# Altium PCB CW308T_MPC57.PcbDoc (part 2 of 2)
Units mil, origin at the board's own origin, x right, y up, seen from the top; angles counter-clockwise.
Board outline 2060 x 3180 mil, 4 copper layers (Component Side, Ground Plane, Power Plane, Solder Side), stack 33.234 mil thick; 90 components, 85 nets, 565 pads, 140 vias.
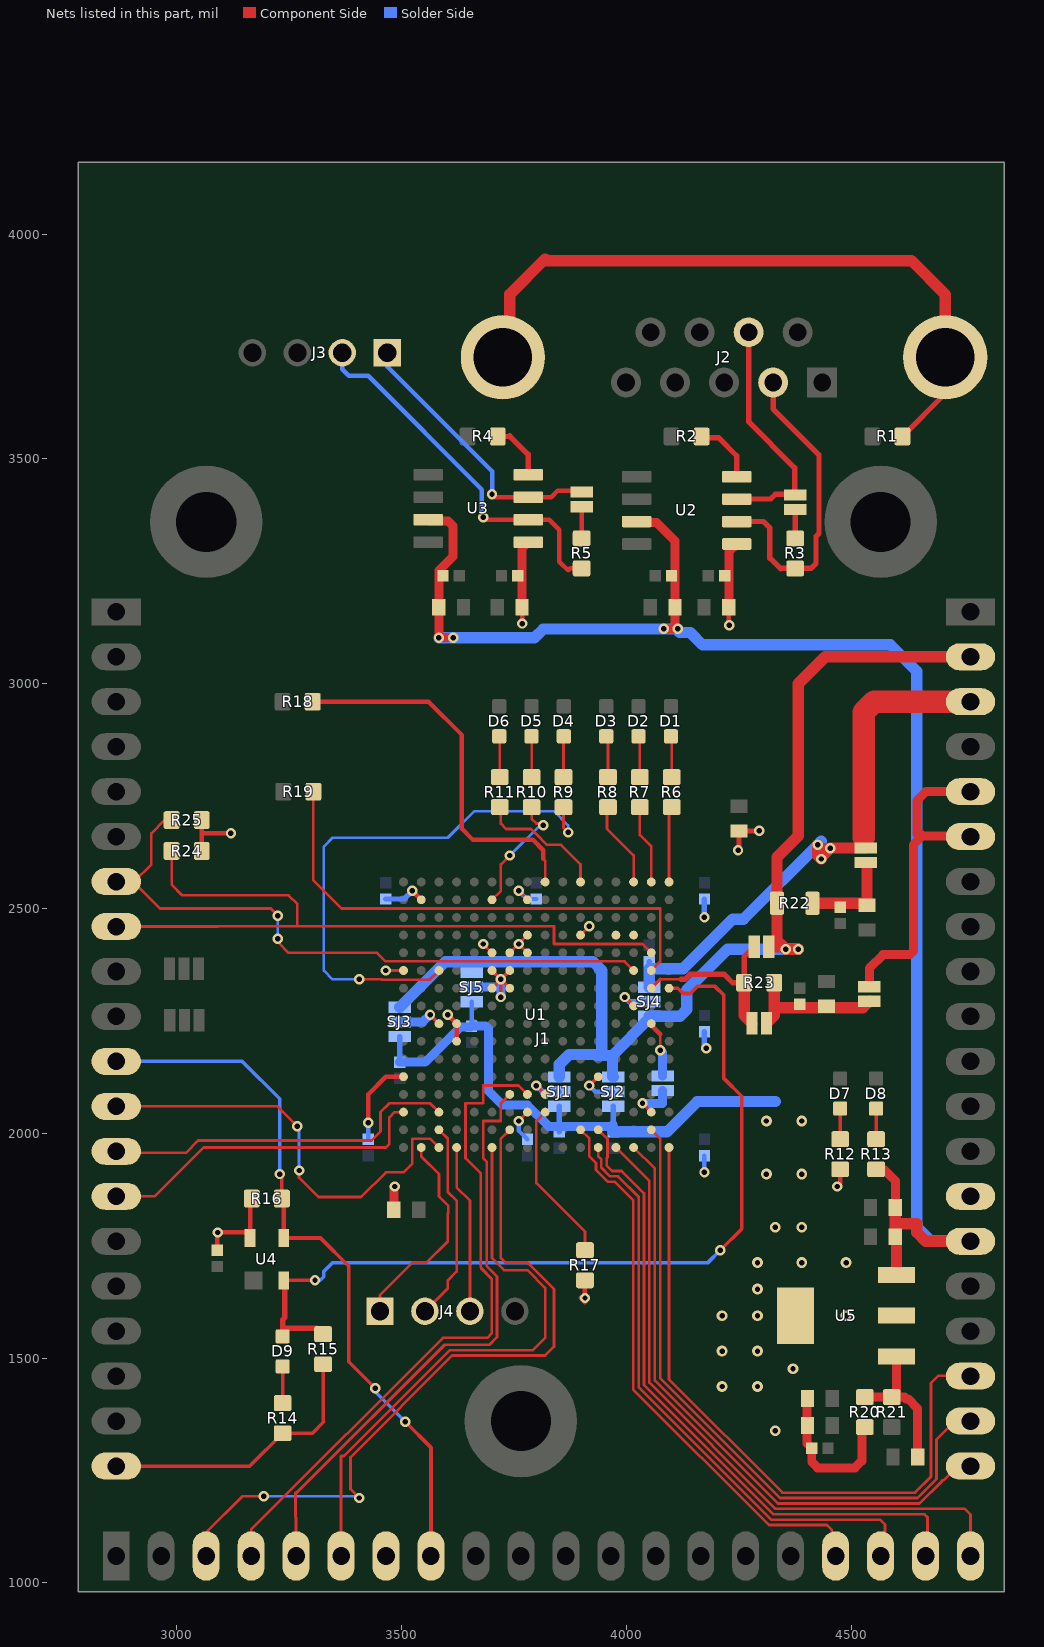
[diagram p4: the nets of this part, all layers, seen from the top]

## Via types
v1: diameter 23, hole 12, Component Side to Solder Side, tented both sides, 114 vias
v2: diameter 24, hole 12, Component Side to Solder Side, tented both sides, 25 vias
v3: diameter 23, hole 12, Component Side to Solder Side, 1 vias

## Nets (pads, with @x,y where several pads share a name; then routed paths per layer and width w, separated by ;. In a path a pad name is that pad's centre, name@x,y a point inside that pad or via, vN(x,y) a via of type N, cw(c..) or ccw(c..) an arc to the next point about the centre after c; other vN are vias at no path point) (continued)
HDR7: J1.B17 U1.B6 | length 1267.9
  Component Side w6: U1.B6@3897.64,2007.87 3917.32,1988.19 3917.32,1948.82 3931.88,1934.26 3931.88,1918.58 3957.95,1892.51 3973.63,1892.51 4014.8,1851.34 4014.8,1430.62 4316.63,1128.79 4446.02,1128.79 4456.69,1118.11 4456.69,1068.31 J1.B17@4465,1060
HDR8: J1.B18 U1.A5 | length 1329.5
  Component Side w6: U1.A5@3937.01,1968.5 3937.01,1948.82 3943.88,1941.95 3943.88,1923.55 3962.92,1904.51 3981.32,1904.51 4026.8,1859.02 4026.8,1435.59 4321.6,1140.79 4563.94,1140.79 4574.8,1129.92 4574.8,1069.8 J1.B18@4565,1060
HDR9: J1.B19 U1.B5 | length 1463.6
  Component Side w6: U1.B5@3937.01,2007.87 3957.54,1987.35 3957.54,1947.16 3955.88,1945.5 3955.88,1928.52 3967.89,1916.51 3989,1916.51 4038.8,1866.71 4038.8,1440.56 4326.57,1152.79 4662.75,1152.79 4669.29,1146.24 4669.29,1064.29 J1.B19@4665,1060
HDR10: J1.B20 U1.A4 | length 1482.2
  Component Side w6: U1.A4@3976.38,1968.5 4050.8,1894.08 4050.8,1445.53 4331.55,1164.79 4656.64,1164.79 4657.21,1165.35 4751.97,1165.35 4765,1152.32 J1.B20@4765,1060
LED1: J1.C18 U1.A1 | length 1520.8
  Component Side w6: U1.A1@4094.49,1968.5 4094.49,1452.76 4346.46,1200.79 4641.73,1200.79 4677.17,1236.22 4677.17,1444.88 4692.91,1460.63 4764.37,1460.63 J1.C18@4765,1460
LED2: J1.C19 U1.B2 | length 1483.6
  Component Side w6: U1.B2@4055.12,2007.87 4074.8,1988.19 4074.8,1455.47 4341.49,1188.79 4646.7,1188.79 4689.17,1231.25 4689.17,1319.09 4730.08,1360 J1.C19@4765,1360
LED3: J1.C20 U1.A3 | length 1388.2
  Component Side w6: U1.A3@4015.75,1968.5 4062.8,1921.45 4062.8,1450.5 4336.52,1176.79 4651.67,1176.79 4701.17,1226.28 4701.17,1227.43 4702.08,1228.35 4704.72,1228.35 4736.38,1260 J1.C20@4765,1260
LED_BLOAD: R11.1 U1.T6 | length 291.6
  Component Side w6: R11.1@3717.91,2725.51 3720.47,2722.95 3720.47,2688.98 3732.28,2677.17 3787.4,2677.17 3797.02,2667.54 3797.14,2667.54 3822.95,2641.73 3854.33,2641.73 3897.64,2598.43 U1.T6@3897.64,2559.06
LED_CLKOK: R10.1 U1.R11 | length 275.5
  Component Side w6: U1.R11@3700.79,2519.69 3720.47,2539.37 3720.47,2598.43 v1(3740.16,2618.11) ; R10.1@3788.86,2725.51 3788.86,2699.33 3799.21,2688.98 3811.02,2688.98 v1(3814.96,2685.04)
  Solder Side w6: v1(3740.16,2618.11) 3807.09,2685.04 v1(3814.96,2685.04)
LED_CORE0: R6.1 U1.T1 | length 169
  Component Side w6: U1.T1@4094.49,2559.06 4094.49,2719.41 R6.1@4100.59,2725.51
LED_CORE1: R7.1 U1.T2 | length 177
  Component Side w6: R7.1@4029.65,2725.51 4029.65,2663.27 4055.12,2637.8 U1.T2@4055.12,2559.06
LED_CORE2: R8.1 U1.T3 | length 191.7
  Component Side w6: R8.1@3958.7,2725.51 3956.69,2723.5 3956.69,2677.17 4015.75,2618.11 U1.T3@4015.75,2559.06
LED_HSM: R9.1 U1.L14 | length 1213.7
  Component Side w6: v1(3405.51,2342.52) 3455.26,2342.52 3456.08,2341.7 3562.18,2341.7 U1.L14@3582.68,2362.2 ; R9.1@3859.8,2725.51 3859.8,2679.57 v1(3870.08,2669.29)
  Solder Side w6: v1(3405.51,2342.52) 3346.46,2342.52 3326.77,2362.2 3326.77,2637.8 3346.46,2657.48 3602.36,2657.48 3661.42,2716.54 3838.58,2716.54 3870.08,2685.04 v1(3870.08,2669.29)
LIN0RX: U1.N4
LIN0TX: U1.N3
MISO: J1.A13 U1.C14 | length 798.2
  Component Side w6: J1.A13@2865,1960 2868.31,1956.69 3019.68,1956.69 3047.24,1984.25 3433.07,1984.25 3452.76,2003.94 3452.76,2047.24 3472.44,2066.93 3562.99,2066.93 U1.C14@3582.68,2047.24
MOSI: J1.A14 U1.C16 | length 751.1
  Component Side w6: J1.A14@2865,1860 2950.55,1860 3059.06,1968.5 3464.57,1968.5 3472.44,1976.38 3472.44,2035.43 3484.25,2047.24 U1.C16@3503.94,2047.24
NetC18_1: C18.1 C19.1 R23.1 SJ11.2 SJ12.1 | length 314.6
  Component Side w25: SJ12.1@4311.22,2245 4328.46,2262.25 4328.46,2279.53 ; R23.1@4328.46,2335 4328.46,2279.53 ; SJ11.2@4540,2293.78 4525.74,2279.53 4328.46,2279.53
NetC31_1: C31.1 R20.2 R21.1 U5.1 | length 330.8
  Component Side w20: R20.2@4530,1413.46 R21.1@4590,1413.46 ; U5.1@4600.39,1503.94 4600.39,1423.86 R21.1@4590,1413.46 ; C31.1@4647.56,1280 4647.56,1387.87 4625.98,1409.45 4622.05,1409.45 4618.11,1413.39 4590.08,1413.39 R21.1@4590,1413.46
NetC32_1: C32.1 C33.1 R22.2 SJ8.1 | length 219.6
  Component Side w25: R22.2@4413.39,2511.81 4530.75,2511.81 C32.1@4535,2507.56 4535,2598.86 SJ8.1@4531.5,2602.36
NetD1_A: D1.A R6.2 | length 91.5
  Component Side w6: D1.A@4098.52,2883.09 4100.59,2881.02 R6.2@4100.59,2792.44
NetD2_A: D2.A R7.2 | length 91.9
  Component Side w6: D2.A@4026.67,2883.09 4029.65,2880.12 R7.2@4029.65,2792.44
NetD3_A: D3.A R8.2 | length 92.3
  Component Side w6: D3.A@3954.82,2883.09 3958.7,2879.21 R8.2@3958.7,2792.44
NetD4_A: D4.A R9.2 | length 90.9
  Component Side w6: R9.2@3859.8,2792.44 3859.8,2882.44 D4.A@3860.45,2883.09
NetD5_A: D5.A R10.2 | length 90.8
  Component Side w6: D5.A@3788.6,2883.09 3788.86,2882.83 R10.2@3788.86,2792.44
NetD6_A: D6.A R11.2 | length 91.1
  Component Side w6: D6.A@3716.75,2883.09 3717.91,2881.93 R11.2@3717.91,2792.44
NetD7_A: D7.A R12.2 | length 68.1
  Component Side w8: R12.2@4475,1987.09 D7.A@4475,2055.16
NetD8_A: D8.A R13.2 | length 68.1
  Component Side w8: R13.2@4555,1987.09 D8.A@4555,2055.16
NetD9_A: D9.A R14.2 | length 81.5
  Component Side w8: R14.2@3235,1400 D9.A@3235,1481.54
NetD9_K: D9.K R15.2 U1.K1 U4.2 | length 1973.7
  Component Side w8: U4.2@3237.4,1672.76 3237.87,1673.23 v1(3307.09,1673.23) ; U1.K1@4094.49,2322.83 4114.17,2322.83 4125.98,2311.02 4141.73,2311.02 4157.48,2326.77 4196.85,2326.77 4216.54,2307.09 4216.54,2122.05 4255.91,2082.68 4255.91,1787.4 v1(4208.66,1740.16)
  Component Side w12: D9.K@3235,1548.46 3235,1566.93 ; U4.2@3237.4,1672.76 3240.16,1670 3240.16,1590.55 3235,1585.39 3235,1566.93 ; R15.2@3325,1553.46 3311.54,1566.93 3235,1566.93
  Solder Side w8: v1(3307.09,1673.23) 3318.9,1673.23 3326.77,1681.1 3326.77,1692.91 3346.46,1712.6 4181.1,1712.6 v1(4208.66,1740.16)
NetJ2_2: J2.2 R3.2 U2.6 | length 711.1
  Component Side w12: U2.6@4245.08,3360.83 4304.53,3360.83 4318.9,3346.46 4318.9,3279.53 4342.52,3255.91 4343.15,3256.54 R3.2@4375,3256.54 4410.08,3256.54 4421.26,3267.72 4421.26,3327.91 4428,3334.65 4428,3509.01 4325.94,3611.06 J2.2@4325.94,3670
NetJ2_7: J2.7 SJ6.2 U2.7 | length 536.1
  Component Side w12: U2.7@4245.08,3410.83 4320.28,3410.83 4330.71,3421.26 4373.74,3421.26 4374.02,3421.54 4374.02,3480.32 4271.42,3582.91 J2.7@4271.42,3781.81
NetJ2_10: J2.10 J2.11 R1.2 | length 1536
  Component Side w12: R1.2@4613.46,3550 4708.82,3645.35 J2.11@4708.82,3725.9
  Component Side w25: J2.10@3724.96,3725.9 3740.16,3741.1 3740.16,3866.14 3818.9,3944.88 3822.83,3940.94 4633.86,3940.94 4708.82,3865.99 J2.11@4708.82,3725.9
NetJ3_1: J3.1 SJ7.2 U3.7 | length 620.4
  Component Side w10: v1(3700.79,3421.26) 3707.05,3415 U3.7@3781.22,3415 3832.32,3415 3846.46,3429.13 3897.08,3429.13 SJ7.2@3900,3426.22
  Solder Side w10: J3.1@3467.72,3736.22 3467.72,3705.51 3700.79,3472.44 v1(3700.79,3421.26)
NetJ3_2: J3.2 R5.2 U3.6 | length 832.5
  Component Side w10: v1(3681.1,3370.08) 3686.18,3365 U3.6@3781.22,3365 3827.91,3365 3850.39,3342.52 3850.39,3271.65 3870.08,3251.97 3874.65,3256.54 R5.2@3900,3256.54
  Solder Side w10: J3.2@3367.72,3736.22 3367.72,3699.21 3381.89,3685.04 3425.2,3685.04 3678.29,3431.95 3678.29,3372.89 v1(3681.1,3370.08)
NetJ4_1: J4.1 U1.A15 | length 470.2
  Component Side w6: J4.1@3451.57,1604.33 3451.57,1640.55 3523.62,1712.6 3555.12,1712.6 3602.36,1759.84 3602.36,1821.4 3603.18,1822.22 3603.18,1839.2 3582.68,1859.7 3582.68,1909.45 3543.31,1948.82 U1.A15@3543.31,1968.5
NetJ4_2: J4.2 U1.B14 | length 449
  Component Side w6: J4.2@3551.57,1604.33 3602.36,1655.12 3602.36,1673.23 3622.05,1692.91 3622.05,1850.39 3602.36,1870.08 3602.36,1988.19 U1.B14@3582.68,2007.87
NetJ4_3: J4.3 U1.A13 | length 376.4
  Component Side w6: U1.A13@3622.05,1968.5 3622.05,1879.92 3651.57,1850.39 J4.3@3651.57,1604.33
NetR2_2: R2.2 U2.8 | length 142.1
  Component Side w12: R2.2@4166.93,3550 4169.69,3547.24 4204.72,3547.24 4245.08,3506.89 U2.8@4245.08,3460.83
NetR3_1: R3.1 SJ6.1 | length 64.1
  Component Side w12: R3.1@4375,3323.46 SJ6.1@4375,3387.57
NetR4_2: R4.2 U3.8 | length 130.4
  Component Side w12: R4.2@3713.46,3550 3738.98,3550 3740.16,3551.18 3781.22,3510.12 U3.8@3781.22,3465
NetR5_1: R5.1 SJ7.1 | length 70.3
  Component Side w10: R5.1@3900,3323.46 SJ7.1@3900,3393.78
NetR17_2: R17.2 U1.C8 | length 360.1
  Component Side w6: U1.C8@3818.9,2047.24 3799.21,2027.56 3799.21,1889.76 3907.48,1781.5 R17.2@3907.48,1740.16
NetR18_2: R18.2 U1.T8 | length 844.5
  Component Side w6: 3814.96,2610.24 3818.9,2606.3 U1.T8@3818.9,2559.06
  Component Side w10: R18.2@3301.93,2960 3559.69,2960 3633.86,2885.83 3633.86,2677.17 3657.48,2653.54 3791.34,2653.54 3814.96,2629.92 3814.96,2610.24
NetR19_1: R19.1 U1.L2 | length 1140.6
  Component Side w6: R19.1@3303.46,2760 3303.46,2562.68 3366.14,2500 4074.8,2500 4074.8,2381.89 U1.L2@4055.12,2362.2
NetR23_2: R23.2 SJ10.2 SJ12.2 U1.K2 | length 414.1
  Component Side w6: 4074.8,2342.52 4122.05,2342.52
  Component Side w8: U1.K2@4055.12,2322.83 4074.8,2342.52
  Component Side w12: 4122.05,2342.52 4129.92,2342.52 4141.73,2354.33 4216.54,2354.33 4236.22,2334.65 4261.18,2334.65 R23.2@4261.54,2335 4261.54,2392.75 SJ10.2@4283.78,2415
  Component Side w25: R23.2@4261.54,2335 4261.54,2262.25 SJ12.2@4278.78,2245
NetSJ1_2: SJ1.2 U1.D8 | length 84.5
  Component Side w8: v1(3799.21,2106.3) U1.D8@3818.9,2086.61
  Solder Side w12: v1(3799.21,2106.3) 3812.71,2092.8 SJ1.2@3850.31,2092.8
NetSJ2_2: SJ2.2 U1.E5 | length 86.4
  Component Side w8: v1(3917.32,2106.3) U1.E5@3937.01,2125.98
  Solder Side w10: v1(3917.32,2106.3) 3930.82,2092.8 SJ2.2@3970.31,2092.8
NetSJ3_2: SJ3.2 U1.H14 | length 102.1
  Component Side w8: v1(3562.99,2263.78) U1.H14@3582.68,2244.09
  Solder Side w20: SJ3.2@3495.31,2247.8 3547.01,2247.8 v1(3562.99,2263.78)
NetSJ4_2: SJ4.2 U1.J3 | length 86.4
  Component Side w8: v1(3996.06,2303.15) U1.J3@4015.75,2283.46
  Solder Side w12: v1(3996.06,2303.15) 4006.43,2292.79 SJ4.2@4050.31,2292.79
NetSJ5_2: SJ5.2 U1.K10 U1.K11 U1.L10 U1.L11 | length 255.8
  Component Side w8: U1.K11@3700.79,2322.83 v1(3720.47,2342.52) ; U1.L11@3700.79,2362.2 v1(3720.47,2342.52) ; v1(3720.47,2303.15) v1(3720.47,2342.52) ; U1.K10@3740.16,2322.83 v1(3720.47,2342.52) ; U1.L10@3740.16,2362.2 v1(3720.47,2342.52)
  Solder Side w20: SJ5.2@3655.31,2325.35 3719.06,2325.35 3720.47,2326.77 ; v1(3720.47,2303.15) 3720.47,2326.77 ; v1(3720.47,2342.52) 3720.47,2326.77
NetSJ9_1: SJ9.1 U1.H2 | length 126.7
  Component Side w6: v1(4074.8,2185.04) 4074.8,2220.47
  Component Side w10: U1.H2@4055.12,2244.09 4055.12,2240.16 4074.8,2220.47
  Solder Side w20: v1(4074.8,2185.04) 4080.31,2179.53 SJ9.1@4080.31,2127.79
NRST: J1.A11 J1.B8 R16.2 U4.3 | length 1602.1
  Component Side w8: v1(3228.35,1909.45) 3233.46,1904.33 R16.2@3233.46,1855 ; U4.3@3237.4,1767.24 3319.37,1767.24 3381.89,1704.72 3381.89,1492.13 v1(3440.94,1433.07) ; v1(3507.87,1358.27) 3565,1301.14 J1.B8@3565,1060
  Component Side w10: R16.2@3233.46,1855 3237.4,1851.06 U4.3@3237.4,1767.24
  Solder Side w8: J1.A11@2865,2160 3145.12,2160 3228.35,2076.77 v1(3228.35,1909.45) ; v1(3440.94,1433.07) 3440.94,1425.2 v1(3507.87,1358.27)
SCK: J1.A12 U1.A14 | length 960.1
  Component Side w6: J1.A12@2865,2060 3223.46,2060 v1(3267.72,2015.75) ; v1(3271.65,1917.32) 3271.65,1901.57 3314.96,1858.27 3409.45,1858.27 3464.57,1913.39 3503.94,1913.39 3523.62,1933.07 3523.62,1988.19 3562.99,1988.19 U1.A14@3582.68,1968.5
  Solder Side w6: v1(3267.72,2015.75) 3271.65,2011.81 v1(3271.65,1917.32)
TCK: J1.B6 U1.A11 | length 1287.7
  Component Side w6: J1.B6@3365,1060 3365,1282.32 3371.65,1282.32 3607.23,1517.91 3791.53,1517.91 3818.9,1545.28 3818.9,1656.26 3779.53,1695.63 3727.6,1695.63 3700.79,1722.44 U1.A11@3700.79,1968.5
TDI: J1.B3 U1.B10 | length 1649.4
  Component Side w6: J1.B3@3065,1060 3065,1112.24 3145.67,1192.91 v1(3192.91,1192.91) ; v1(3405.51,1188.98) 3385.83,1208.66 3385.83,1279.53 3612.2,1505.91 3818.9,1505.91 3838.58,1525.59 3838.58,1653.54 3779.53,1712.6 3730.31,1712.6 3720.47,1722.44 3720.47,1988.19 U1.B10@3740.16,2007.87
  Solder Side w6: v1(3192.91,1192.91) 3401.57,1192.91 v1(3405.51,1188.98)
TDO: J1.B4 U1.D9 | length 1496
  Component Side w6: J1.B4@3165,1060 3165,1118.98 3591.3,1545.28 3690.22,1545.28 3700.06,1555.12 3700.06,1676.67 3676.79,1699.94 3676.79,1701.91 3675.94,1702.76 3675.94,1910.67 3641.73,1944.88 3641.73,2066.93 3681.1,2066.93 3681.1,2106.3 3759.84,2106.3 U1.D9@3779.53,2086.61
TMS: J1.B5 U1.D10 | length 1333.1
  Component Side w6: J1.B5@3265,1060 3265,1145.67 3263.78,1146.89 3263.78,1200.79 3266.49,1200.79 3595.61,1529.91 3695.26,1529.91 3712.06,1546.71 3712.06,1681.64 3688.79,1704.91 3688.79,1937.2 3681.1,1944.88 3681.1,2027.56 3720.47,2027.56 3720.47,2066.93 U1.D10@3740.16,2086.61
UART_RX: J1.A8 R24.2 U1.M2 | length 1659.4
  Component Side w6: J1.A8@2865,2460 3091.18,2460 3091.81,2460.63 3267.72,2460.63 ; R24.2@2988.19,2627.95 2988.19,2553.15 3011.81,2529.53 3248.03,2529.53 3267.72,2509.84 3267.72,2460.63 ; U1.M2@4055.12,2401.57 4035.43,2421.26 3838.58,2421.26 3838.58,2460.63 3267.72,2460.63
UART_TX: J1.A7 R25.2 U1.L3 | length 1449.9
  Component Side w6: J1.A7@2865,2560 J1.A7@2902.6,2560 ; R25.2@2988.19,2696.85 2972.44,2696.85 2942.91,2667.32 2942.91,2598.43 2904.49,2560 J1.A7@2902.6,2560 ; v1(3224.41,2433.07) 3224.41,2425.2 3248.03,2401.57 3444.88,2401.57 3463.75,2382.7 3995.25,2382.7 U1.L3@4015.75,2362.2 ; v1(3224.41,2484.25) 3208.66,2500 2962.6,2500 J1.A7@2902.6,2560
  Solder Side w6: v1(3224.41,2433.07) v1(3224.41,2484.25)
VCC5V: C3.1 C4.1 C7.1 C8.1 C26.1 C27.1 J1.C15 R13.1 U2.3 U3.3 U5.3 | length 3629.8
  Component Side w20: U3.3@3558.78,3365 3561.57,3362.2 3602.36,3362.2 3614.17,3350.39 3614.17,3283.46 3582.44,3251.73 C8.1@3582.44,3170 3582.44,3102.6 v1(3582.68,3102.36) v1(3614.17,3102.36) ; U2.3@4022.64,3360.83 4025.2,3358.27 4066.93,3358.27 4107.56,3317.64 C4.1@4107.56,3170 4107.56,3128.66 v1(4114.17,3122.05) v1(4082.68,3122.05) ; R13.1@4555,1920.16 4571.97,1920.16 4598.43,1893.7 4598.43,1835.87 C26.1@4597.56,1835
  Component Side w25: C26.1@4597.56,1835 4597.56,1804.02 ; U5.3@4600.39,1685.04 4600.39,1767.17 C27.1@4597.56,1770 4597.56,1804.02 ; J1.C15@4765,1760 4665.2,1760 4645.67,1779.53 4645.67,1799.21 4602.36,1799.21 4597.56,1804.02
  Solder Side w25: v1(3582.68,3102.36) v1(3614.17,3102.36) 3795.28,3102.36 3814.96,3122.05 v1(4082.68,3122.05) v1(4114.17,3122.05) 4114.17,3118.11 4118.11,3114.17 4141.73,3114.17 4169.29,3086.61 4586.61,3086.61 4645.67,3027.56 4645.67,1791.34 4677.01,1760 J1.C15@4765,1760
VCCINT: C20.1 C21.1 C22.1 C23.1 C24.1 C28.1 C29.1 C30.1 J1.C3 R20.1 SJ1.3 SJ2.3 SJ3.3 SJ4.3 SJ5.3 SJ8.2 U5.2 U5.4 | length 2946.6
  Component Side w20: C28.1@4402.44,1410 4401.57,1409.13 4401.57,1310.32 C30.1@4411.89,1300 4411.89,1269.21 4425.2,1255.91 4507.87,1255.91 4523.62,1271.65 4523.62,1340.16 R20.1@4530,1346.54 ; 4527.56,2657.48 4527.56,2638.73 SJ8.2@4531.5,2634.8 ; J1.C3@4760.43,2964.57 J1.C3@4765,2960
  Component Side w25: v1@4448.82,2633.86 4433.07,2633.86 v1(4425.2,2641.73) 4425.2,2618.11 v1(4433.07,2610.24) 4433.07,2614.17 4440.94,2622.05 ; v1(4452.76,2633.86) 4440.94,2622.05 ; SJ8.2@4531.5,2634.8 4453.69,2634.8 4440.94,2622.05
  Component Side w50: 4527.56,2657.48 4527.56,2937.01 4550.55,2960 J1.C3@4765,2960
  Solder Side w10: C24.1@3655.31,2238.46 SJ5.3@3655.31,2292.91
  Solder Side w12: C23.1@3495.31,2158.46 SJ3.3@3495.31,2215.35 ; C21.1@3850.31,2003.46 3850.31,2015.75 SJ1.3@3850.31,2060.35 ; C22.1@3970.31,2003.46 3970.31,2019.68 SJ2.3@3970.31,2060.35 ; 4050.31,2366.14 C20.1@4050.31,2382.24
  Solder Side w20: C23.1@3495.31,2158.46 3552.17,2158.46 3629.92,2236.22 3653.07,2236.22 C24.1@3655.31,2238.46 3686.73,2238.46 3692.47,2232.72 3692.47,2212.81 3692.91,2212.37 3692.91,2094.49 3724.41,2062.99 3779.53,2062.99 3826.77,2015.75 3850.31,2015.75 3966.38,2015.75 3970.31,2019.68
  Solder Side w25: C22.1@3970.31,2003.46 4090.08,2003.46 4157.48,2070.87 4330.71,2070.87 ; SJ4.3@4050.31,2325.23 4050.31,2366.14 4125.98,2366.14 4236.22,2476.38 4259.84,2476.38 v1(4425.2,2641.73) v1@4433.07,2649.61
  other v2: 4330.71,1338.58 4212.6,1437.01 4291.34,1437.01 4370.08,1476.38 4212.6,1515.75 4291.34,1515.75 4212.6,1594.49 4291.34,1594.49 4488.19,1594.49 4291.34,1653.54 4291.34,1712.6 4389.76,1712.6 4488.19,1712.6 4330.71,1791.34 4389.76,1791.34 4311.02,1909.45 4389.76,1909.45 4311.02,2027.56 4389.76,2027.56
VCCINT_ADJ: J1.C5 J1.C6 SJ11.1 | length 742.4
  Component Side w20: SJ11.1@4540,2326.22 4540,2366.77 4570.87,2397.64 4629.92,2397.64 4637.8,2405.51 4637.8,2641.73 4657.48,2661.42 ; J1.C6@4765,2660 4763.58,2661.42 4657.48,2661.42 ; J1.C5@4765,2760 4665.51,2760 4645.67,2740.16 4645.67,2665.35 4653.54,2665.35 4657.48,2661.42
VCCINT_SHUNTLOW: J1.C2 R22.1 SJ1.1 SJ2.1 SJ3.1 SJ4.1 SJ5.1 SJ10.1 | length 2520.3
  Component Side w25: SJ10.1@4316.22,2415 v1@4348.78,2415 ; v1(4381.89,2409.45) v1(4354.33,2409.45) v1@4348.78,2415 ; J1.C2@4765,3060 4441.89,3060 4381.89,3000 4381.89,2661.42 4334.65,2614.17 R22.1@4334.65,2511.81 4334.65,2429.13 v1@4348.78,2415
  Solder Side w25: SJ3.1@3495.31,2280.23 3596.97,2381.89 3925.2,2381.89 3944.88,2362.2 3944.88,2173.23 ; SJ1.1@3850.31,2125.23 3850.39,2125.31 3850.39,2153.54 3872.52,2175.67 3929.75,2175.67 3932.19,2173.23 3944.88,2173.23 ; SJ2.1@3970.31,2125.23 3968.5,2127.04 3968.5,2173.23 ; v1(4381.89,2409.45) v1(4354.33,2409.45) 4224.41,2409.45 4133.86,2318.9 4133.86,2275.59 4118.62,2260.35 SJ4.1@4050.31,2260.35 4050.31,2255.04 3968.5,2173.23 ; 3944.88,2173.23 3968.5,2173.23
VCCIO: C1.1 C2.1 C5.1 C6.1 C9.1 C10.1 C11.1 C12.1 C13.1 C14.1 C15.1 C16.1 C17.1 C25.1 J1.A20 J1.B7 J1.C14 R12.1 R14.1 R15.1 R16.1 R17.1 R24.1 R25.1 SJ9.2 U1.C2 U1.C9 U1.E16 U1.G13 U1.H13 U1.L16 U1.M9 U1.M10 U1.M11 U1.N6 U1.N9 U1.R9 U1.R15 U2.5 U3.5 U4.4 | length 2497.2
  Component Side w6: v1(3464.57,2362.2) U1.L16@3503.94,2362.2 ; v1(3681.1,2421.26) U1.M11@3700.79,2401.57 ; U1.M10@3740.16,2401.57 v1(3759.84,2421.26) ; v1(3759.84,2027.56) U1.C9@3779.53,2047.24 ; v1(3759.84,2539.37) U1.R9@3779.53,2519.69 ; U1.M9@3779.53,2401.57 v1(3759.84,2421.26) ; U1.N9@3779.53,2440.94 v1(3759.84,2421.26) ; U1.N6@3897.64,2440.94 v1(3917.32,2460.63)
  Component Side w8: J1.A20@2865,1260 3161.93,1260 R14.1@3235,1333.07 3301.57,1333.07 3326.77,1358.27 3325,1360.04 R15.1@3325,1486.54 ; v1(4035.43,2066.93) U1.C2@4055.12,2047.24
  Component Side w10: R24.1@3055.12,2627.95 3055.12,2667.32 ; R25.1@3055.12,2696.85 3055.12,2667.32 ; C25.1@3090,1740 3090,1778.98 v1(3090.55,1779.53) 3150.31,1779.53 U4.4@3162.6,1767.24 3162.6,1851.06 R16.1@3166.54,1855 ; v3(3120.08,2667.32) 3055.12,2667.32 ; v1(3425.2,2023.62) 3425.2,2086.61 3464.57,2125.98 U1.E16@3503.94,2125.98 ; v1(3523.62,2539.37) U1.R15@3543.31,2519.69 ; v1(3602.36,2263.78) U1.H13@3622.05,2244.09 U1.G13@3622.05,2204.72 ; C5.1@3767.56,3170 3767.56,3134.02 v1(3767.72,3133.86) ; v1(3907.48,1633.86) 3897.64,1633.86 3907.48,1624.02 R17.1@3907.48,1663.39 ; C1.1@4227.56,3170 4227.56,3130.71 v1(4228.35,3129.92) ; v1(4468.5,1881.89) 4475,1888.39 R12.1@4475,1920.16
  Component Side w12: v1(4248.03,2629.92) 4250,2631.89 C17.1@4250,2672.44 4294.49,2672.44 v1(4295.28,2673.23)
  Component Side w20: C16.1@3482.44,1830 3482.44,1880.08 v1(3484.25,1881.89) ; C5.1@3767.56,3170 3767.56,3301.34 U3.5@3781.22,3315 ; C1.1@4227.56,3170 4227.56,3293.31 U2.5@4245.08,3310.83
  Solder Side w10: C9.1@3425.2,1986.61 v1(3425.2,2023.62) ; v1(3759.84,2027.56) 3759.84,2006.3 C13.1@3779.53,1986.61 ; v1(3759.84,2539.37) 3777.95,2521.26 C12.1@3799.21,2521.26 ; v1(4173.23,1913.39) C10.1@4173.23,1950.39
  Solder Side w12: C15.1@3464.57,2521.26 3505.51,2521.26 v1(3523.62,2539.37) ; C14.1@4173.23,2225.98 4173.23,2192.91 v1(4177.17,2188.98) ; v1(4173.23,2480.32) C11.1@4173.23,2521.26
  Solder Side w20: v1(4035.43,2066.93) 4080.31,2066.93 SJ9.2@4080.31,2095.35
pads on no net: D1.0 D2.0 D3.0 D4.0 D5.0 D6.0 D7.0 D8.0 D9.0 J1.A1 J1.A17 J1.A19 J1.B2 J1.C8 J1.C11 J1.C12 J1.C13 J1.MH1 J1.MH2 J2.1 J2.4 J2.5 J2.6 J2.8 J2.9 J3.3 R1.0 R2.0 R3.0 R4.0 R5.0 R6.0 R7.0 R8.0 R9.0 R10.0 R11.0 R12.0 R13.0 R14.0 R15.0 R16.0 R17.0 R18.0 R19.0 R20.0 R21.0 R22.0 R23.0 R24.0 R25.0 U1.A2 U1.A9 U1.A12 U1.A16 U1.B1 U1.B3 U1.B4 U1.B9 U1.B11 U1.B12 U1.B13 U1.B15 U1.B16 U1.C1 U1.C3 U1.C4 U1.C5 U1.C6 U1.C7 U1.C10 U1.C11 U1.C12 U1.C13 U1.C15 U1.D1 U1.D3 U1.D4 U1.D5 U1.D6 U1.D7 U1.D11 U1.D12 U1.D13 U1.D14 U1.D15 U1.D16 U1.E1 U1.E3 U1.E4 U1.E7 U1.E8 U1.E9 U1.E10 U1.E11 U1.E12 U1.E13 U1.E14 U1.E15 U1.F1 U1.F2 U1.F3 U1.F4 U1.F5 U1.F6 U1.F7 U1.F8 U1.F9 U1.F10 U1.F11 U1.F12 U1.F13 U1.F14 U1.F15 U1.F16 U1.G1 U1.G2 U1.G3 U1.G4 U1.G5 U1.G12 U1.G14 U1.G16 U1.H1 U1.H3 U1.H4 U1.H5 U1.H12 U1.J2 U1.J4 U1.J5 U1.J12 U1.J13 U1.J14 U1.J15 U1.K3 U1.K4 U1.K5 U1.K12 U1.K13 U1.K14 U1.K15 U1.K16 U1.L1 U1.L4 U1.L5 U1.L12 U1.L13 U1.L15 U1.M1 U1.M3 U1.M4 U1.M5 U1.M6 U1.M7 U1.M8 U1.M12 U1.M13 U1.M14 U1.M15 U1.N1 U1.N2 U1.N5 U1.N7 U1.N8 U1.N10 U1.N11 U1.N12 U1.N13 U1.N14 U1.N15 U1.N16 U1.P1 U1.P2 U1.P3 U1.P4 U1.P5 U1.P6 U1.P7 U1.P8 U1.P9 U1.P10 U1.P11 U1.P12 U1.P13 U1.P14 U1.P15 U1.P16 U1.R1 U1.R3 U1.R4 U1.R6 U1.R7 U1.R8 U1.R10 U1.R12 U1.R13 U1.R14 U1.R16 U1.T7 U1.T10 U1.T11 U1.T12 U1.T13 U1.T14 U1.T16

## Polygon pours and split planes (outlines as drawn)
VCCINT on Solder Side "VCCINT_BOT" (solid, pour order 4): 4295.28,2043.31 4291.34,2047.24 4161.42,2047.24 4094.49,1980.32 4090.55,1984.25 3870.08,1984.25 3527.56,1984.25 3385.83,2125.98 3366.14,2145.67 3366.14,2500 3366.14,2547.24 3425.2,2606.3 3440.94,2622.05 4204.72,2622.05 4464.57,2677.17 4464.57,2598.43 4303.15,2535.43 4303.15,2145.67
VCCINT on Solder Side "VCCTH_BOT" (solid, pour order 2): 4271.65,2133.86 4374.02,2133.86 4425.2,2082.68 4425.2,1877.95 4425.2,1866.14 4456.69,1834.65 4484.25,1862.2 4543.31,1862.2 4586.61,1862.2 4618.11,1830.71 4629.92,1818.9 4629.92,1366.14 4629.92,1196.85 4606.3,1173.23 4594.49,1185.04 4169.29,1185.04 4161.42,1185.04 4114.17,1232.28 4086.61,1259.84 4086.61,1582.68 4086.61,1598.43 4149.61,1661.42 4161.42,1673.23 4216.54,1673.23 4216.54,1677.17 4267.72,1748.03
VCCINT on Component Side "VCCTH_TOP" (solid, pour order 0): 4265.75,1348.43 4299.21,1314.96 4425.2,1307.09 4425.2,1472.44 4440.94,1488.19 4452.76,1500 4507.87,1500 4507.87,1511.81 4547.24,1551.18 4555.12,1559.06 4657.48,1559.06 4673.23,1574.8 4673.23,1622.05 4673.23,1629.92 4665.35,1637.8 4661.42,1641.73 4539.37,1641.73 4535.43,1641.73 4511.81,1665.35 4503.94,1673.23 4503.94,1728.35 4492.13,1728.35 4452.76,1767.72 4460.63,1775.59 4460.63,1834.65 4460.63,1838.58 4421.26,1877.95 4421.26,2039.37 4421.26,2043.31 4385.83,2078.74 4330.71,2078.74 4299.21,2078.74 4283.46,2062.99 4279.53,2059.06 4279.53,1744.09 4181.1,1645.67 4161.42,1625.98 4161.42,1452.76
GND on Ground Plane (split plane): 4819.9,1000.1 2800.1,1000.1 2800.1,4139.9 4819.9,4139.9
VCCIO on Power Plane (split plane): 4819.9,1000.1 2800.1,1000.1 2800.1,4139.9 4819.9,4139.9

## Silkscreen, mask and mechanical layers (free items; w line width, h text height)
Top Overlay:
  lines w7.87: 2952.76,3041.34 2952.76,3139.76 2972.44,3139.76 3523.62,3139.76 3523.62,3041.34 2952.76,3041.34
  lines w11.81: 2824.8,3484.25 2824.8,3848.43 2874.02,3848.43 2982.28,3848.43 2982.28,3484.25 2824.8,3484.25
  text "MPC5748G Target / ChipWhisperer / CW308 UFO" at 2805.12,3877.95 h78.74
  text "CAN0" at 3582.68,3828.74 h50 r90
  text "CAN4" at 3216.54,3818.9 h50
  text "GND" at 3188.98,3531.5 h50 r90
  text "SJ6/SJ7 / Set term." at 2972.44,3503.94 h39.37 r90
  text "CANL" at 3385.83,3492.13 h50 r90
  text "CANH" at 3496.06,3488.19 h50 r90
  text "CWDOCS.COM/MP57" at 2982.28,3070.87 h35.43
  text "BT" at 3736.22,3015.75 h40 r90
  text "CLK" at 3811.02,3015.75 h40 r90
  text "HSM" at 3881.89,3015.75 h40 r90
  text "C2" at 3972.44,3015.75 h40 r90
  text "C1" at 4043.31,3015.75 h40 r90
  text "C0" at 4118.11,3015.75 h40 r90
  text "EXTAL" at 2968.5,2944.88 h40
  text "PG7" at 2960.63,2744.09 h40
  text "PB0" at 2962.6,2539.37 h40
  text "PB1" at 2962.6,2440.94 h40
  text "PI7/PI10" at 3090.55,2401.57 h35.43
  text "PI6/PI11" at 3090.55,2165.35 h35.43
  text "PE14" at 2962.6,2037.4 h40
  text "PE12" at 2962.6,1938.98 h40
  text "PowerPC Triple-Core" at 3415.35,1899.61 h40 r90
  text "PE13" at 2962.6,1840.55 h40
  text "PH11" at 3673.23,1673.23 h40 r90
  text "GND" at 3771.65,1673.23 h40 r90
  text "RST" at 3188.98,1464.57 h40 r90
  text "PI12" at 2962.6,1437.01 h40
  text "NewAE Technology Inc." at 4059.06,1303.15 h59.06 r90
  text "RX/PA11" at 3570.87,1291.34 h40 r90
  text "TX/PA10" at 3468.5,1283.46 h40 r90
  text "PE4" at 3946.85,1259.84 h39.84 r270
  text "PE5" at 4045.28,1259.84 h40 r270
  text "PE2" at 4143.66,1259.84 h40 r270
  text "PH5" at 4245.48,1259.84 h40 r270
  text "PH8" at 4343.91,1259.84 h40 r270
  text "PE3" at 3848.43,1250 h35.43 r270
  text "JTAG Programming Port" at 2972.44,1181.1 h35.43
Bottom Overlay:
  drawing of 30 lines, arcs and shapes, not listed
  text "CAN0  DB9 / CANL Pin 2 / CANH Pin 5 / GND  Pin 3" at 4458.66,3828.74 h47.24
  text "Enabled / Disabled" at 4527.56,3021.65 h43.31 r90
  text "HSM:" at 4350.39,3011.81 h60 r90
  text "A / B" at 3767.72,2263.78 h70.87
  text "B / A" at 4003.94,2228.35 h70.87
  text "A / B" at 3452.76,2185.04 h70.87
  text "VFLASH" at 4370.08,2086.61 h39.37
  text "A / B" at 3720.47,2027.56 h70.87
  text "A / B" at 3799.21,2027.56 h70.87
  text "VDD_LV / A SHUNT / B VINT (DEC.)" at 3326.77,1968.5 h39.37
  text "NewAE Technology Inc." at 4314.96,1759.84 h50
  text "NAE-CW308T-MPC5748G-02" at 4322.83,1673.23 h50
  text "RoHS / PB-Free" at 4267.72,1503.94 h50
  text "C" at 3582.68,1220.47 h250
  text "W" at 3129.92,1171.26 h250
  text "p" at 3356.3,1161.42 h250
Mechanical 1:
  the board outline again, w10

## Text inside footprints (layer, text, board x,y; h text height)
J2: Top Overlay "9" at 4037.59,3824.92 h39.37; Top Overlay "1" at 4435.59,3722.76 h39.37